# Altium PCB Плата печатная.PcbDoc
Units mm, origin at the board's own origin, x right, y up, seen from the top; angles counter-clockwise.
Board outline 102.74 x 86.87 mm, 2 copper layers (Top Layer, Bottom Layer), stack 1.27 mm thick; 43 components, 38 nets, 143 pads, 13 vias.
Unrouted connection lines stored in the file: 6.
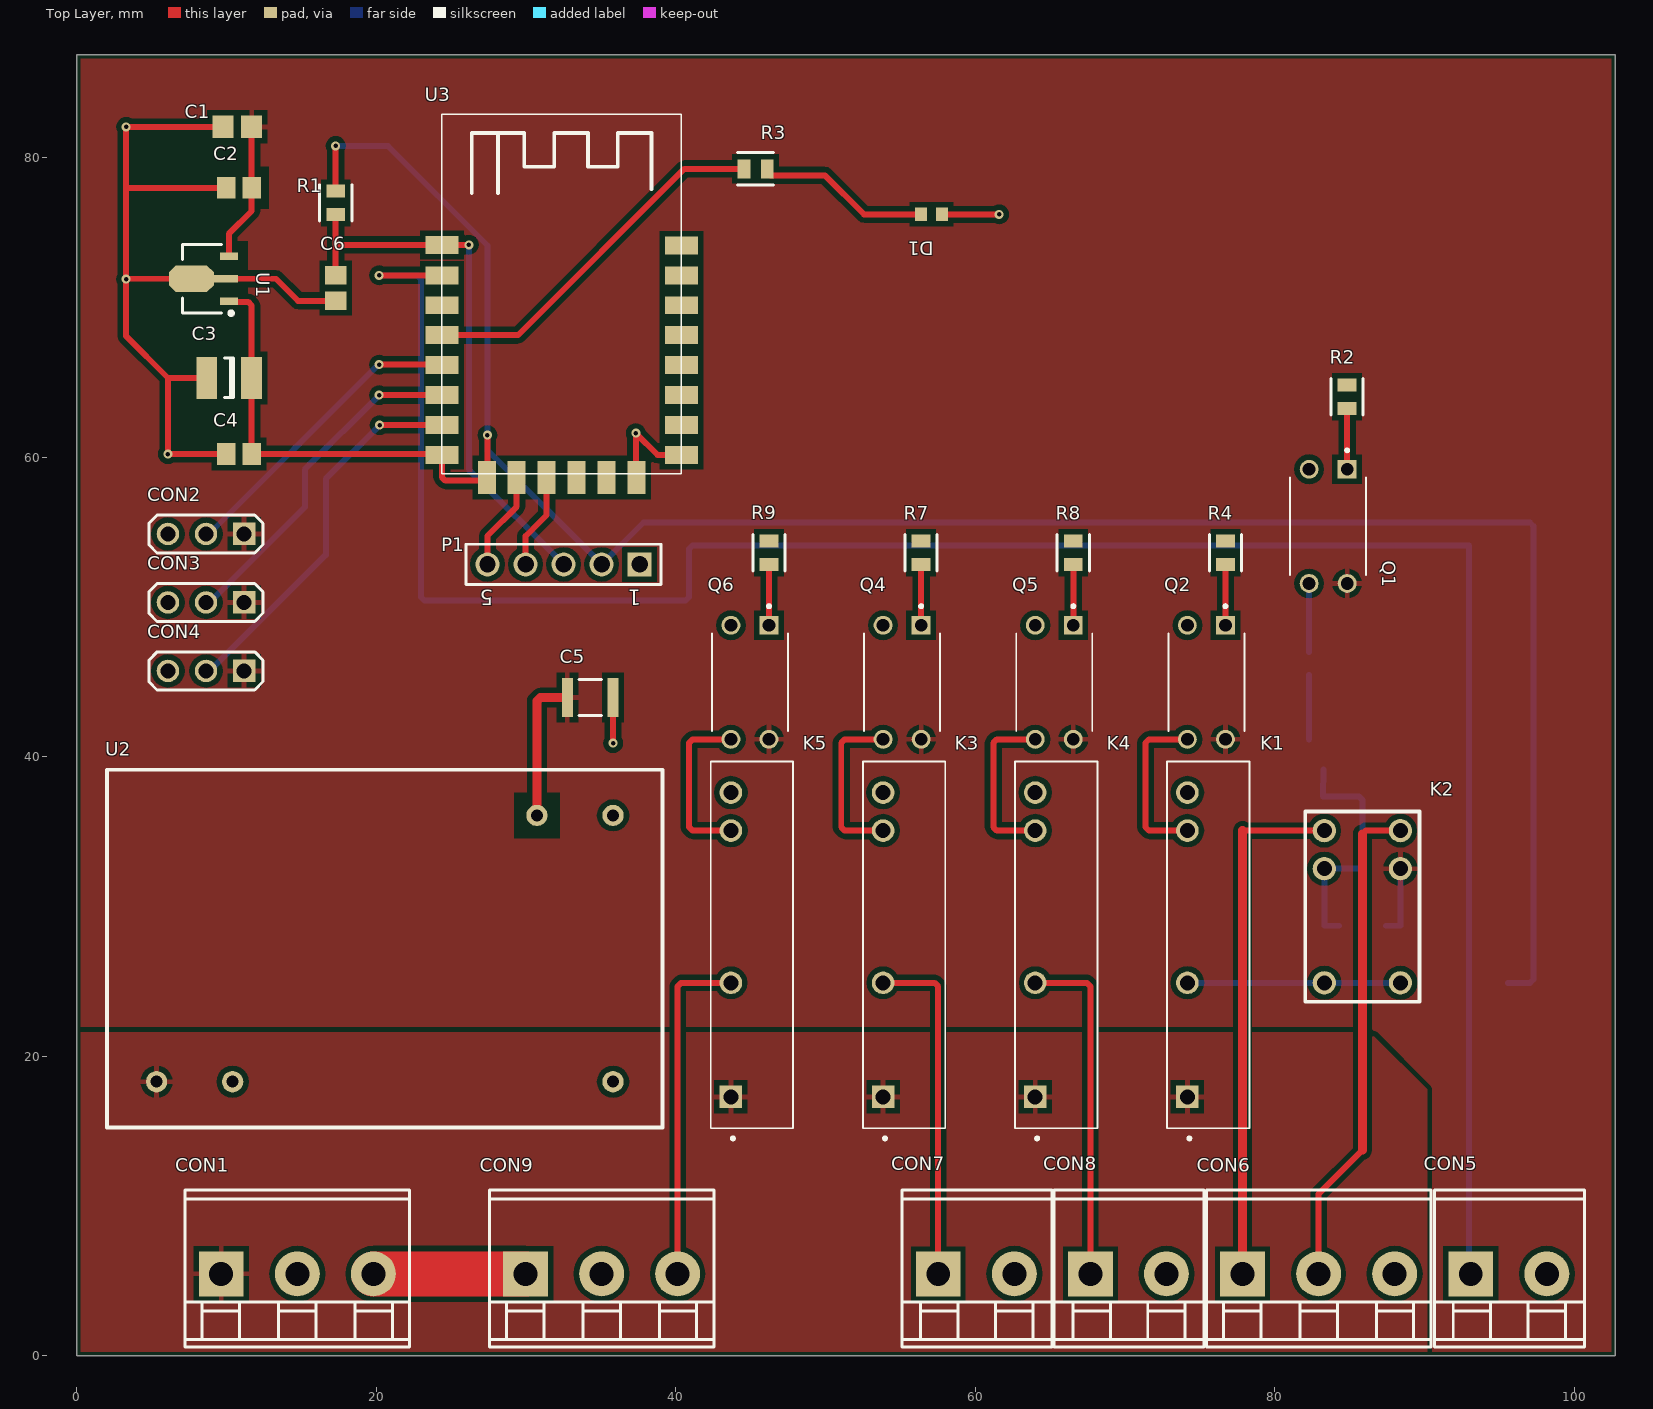
[diagram p0: Top Layer view]
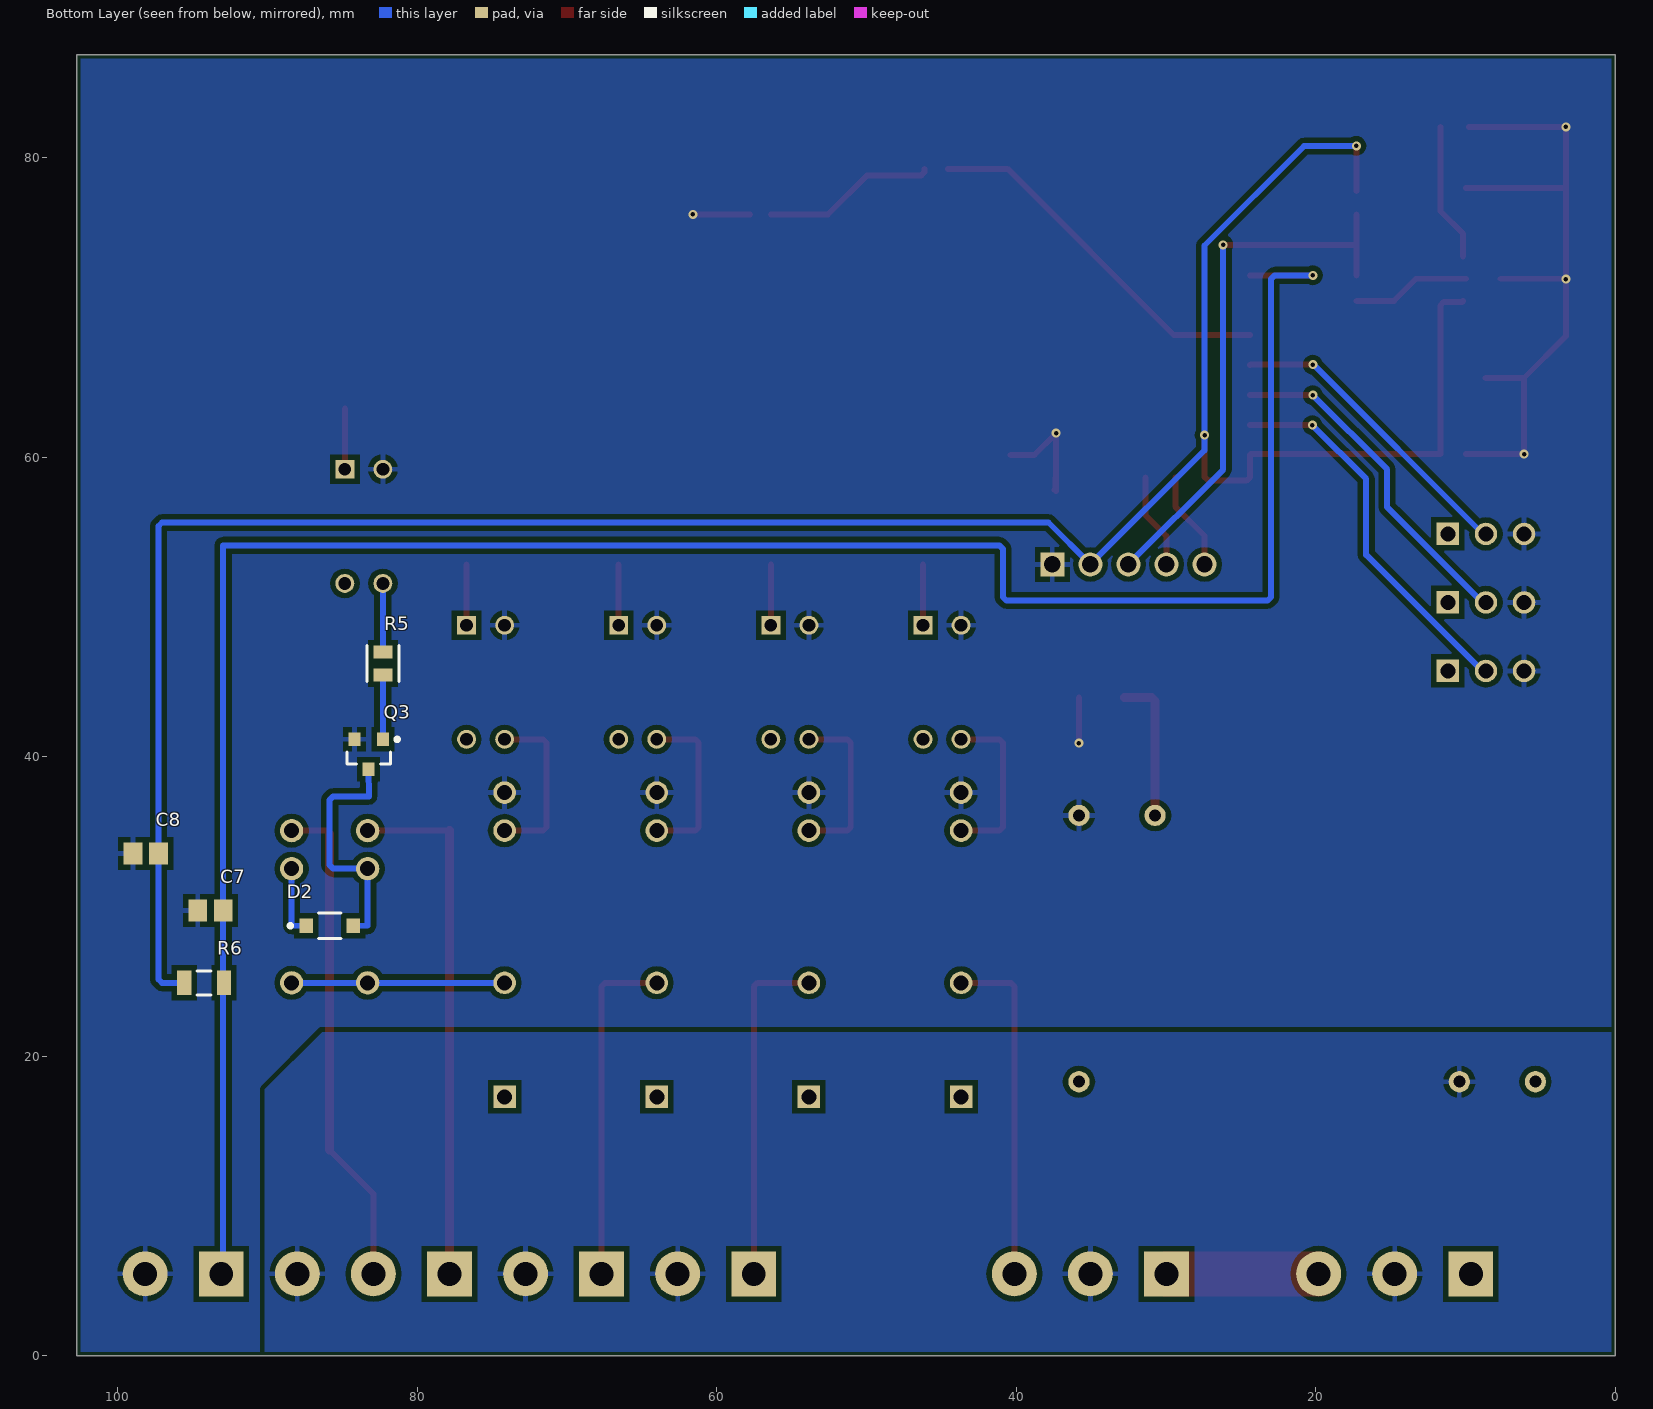
[diagram p1: Bottom Layer view, seen from below]
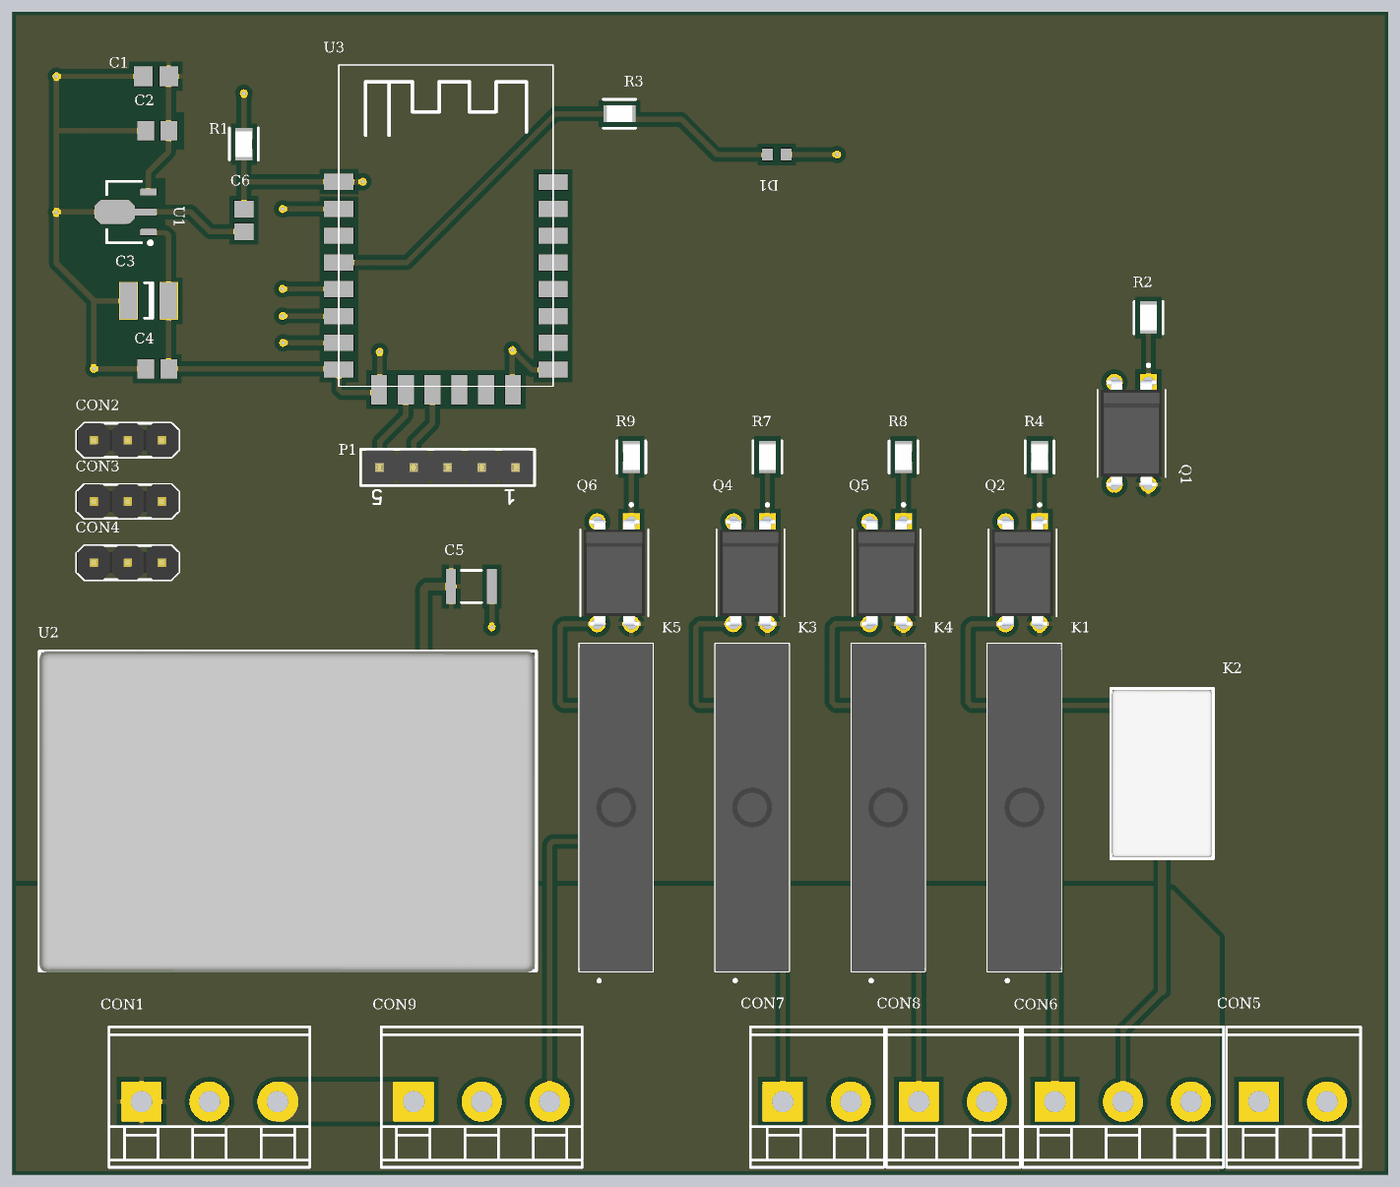
[diagram p2: 3D render of the assembled board from above, using the file's embedded part models]
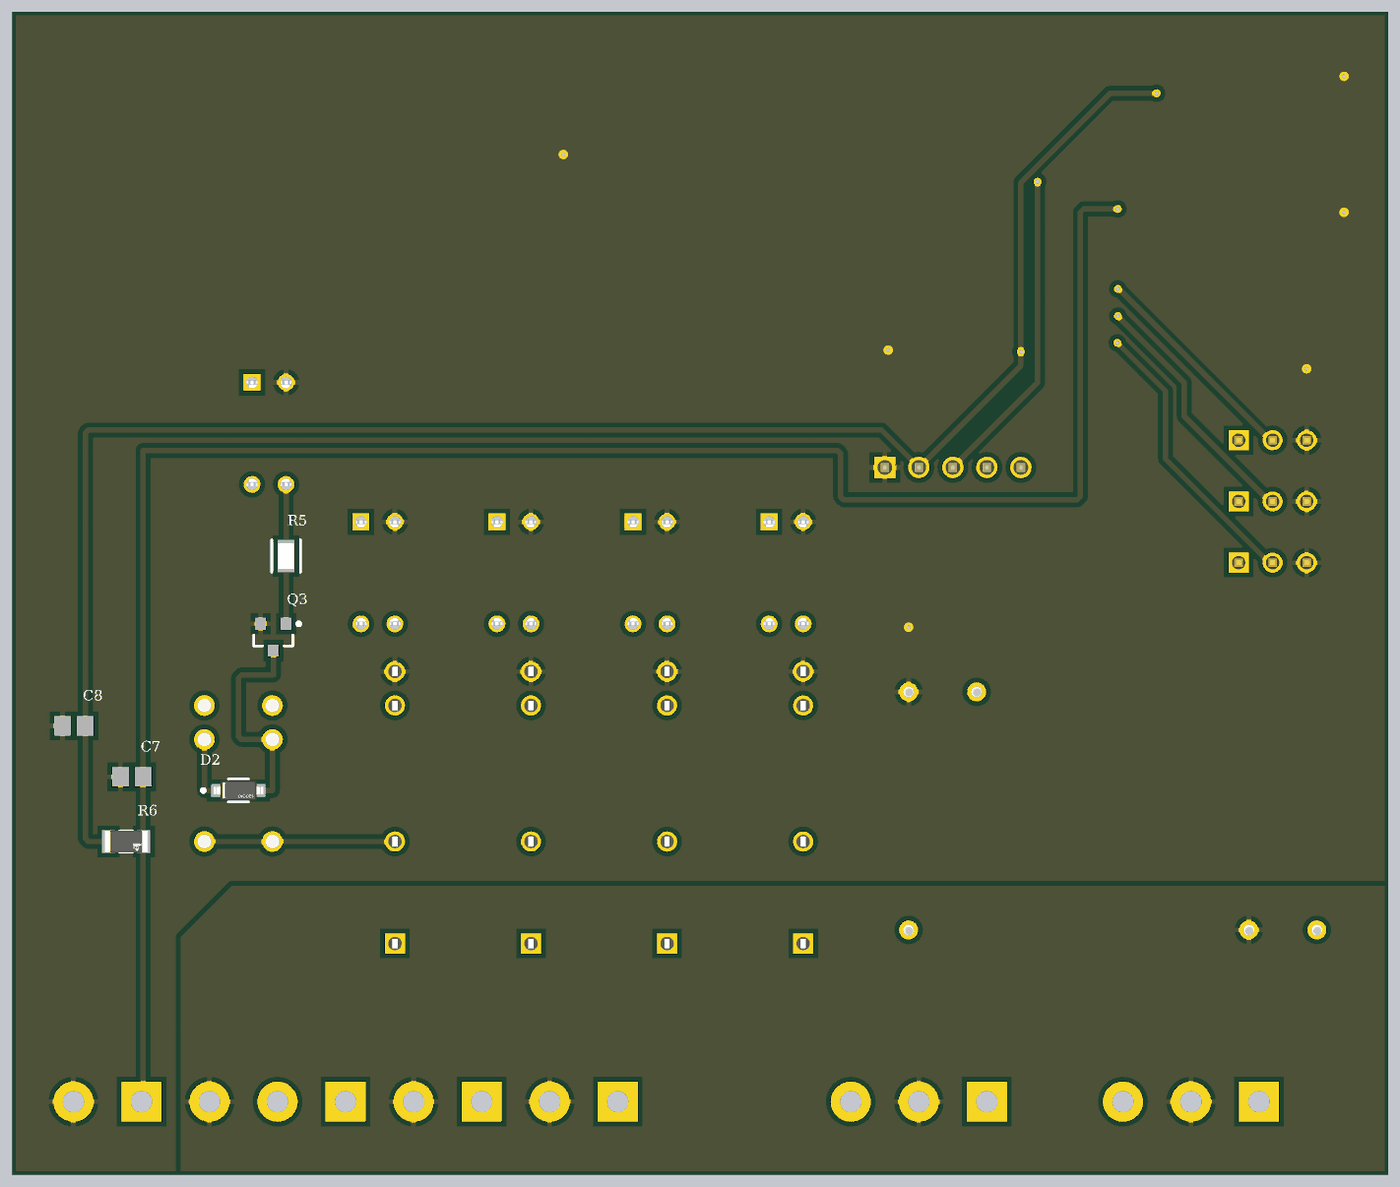
[diagram p3: 3D render of the assembled board from below, using the file's embedded part models]

## Layer stack, top to bottom
Top Solder: solder mask 0.0254, SM-001, Dk 4
Top Layer: signal copper 0.035
Dielectric 1: core 1.2, FR4, Dk 4.6
Bottom Layer: signal copper 0.035
Bottom Solder: solder mask 0.0254, SM-001, Dk 4

## Board outline
0,0 102.743,0 102.743,86.868 0,86.868

## Design rules (kind name [scope] priority, off if disabled: settings)
AcuteAngle [All] p1: minimum=3.50000000000000E+0001 checktracksonly=FALSE
BoardOutlineClearance "BoardOutlineClearance 1" [All] p1: gap=0.25 ignorepadtopadclearanceinfootprint=FALSE except(0: Arc-SplitContinuation Track-SplitContinuation SMDPad-SplitContinuation THPad-SplitContinuation Via-SplitContinuation Fill-SplitContinuation Poly-SplitContinuation Region-SplitContinuation Text-SplitContinuation) // Milling
BoardOutlineClearance "BoardOutlineClearance 2" [All] p2: gap=0.4 ignorepadtopadclearanceinfootprint=FALSE except(0: Arc-SplitContinuation Track-SplitContinuation SMDPad-SplitContinuation THPad-SplitContinuation Via-SplitContinuation Fill-SplitContinuation Poly-SplitContinuation Region-SplitContinuation Text-SplitContinuation) // V-Cut
Clearance "Clearance 3 Oz" [All] p1: gap=0.35 ignorepadtopadclearanceinfootprint=FALSE except(0.25: Arc-Hole Track-Hole SMDPad-Hole THPad-Hole Via-Hole Fill-Hole Poly-Hole Region-Hole Text-Hole)
Clearance "Clearance 2 Oz" [All] p2: gap=0.3 ignorepadtopadclearanceinfootprint=FALSE except(0.25: Arc-Hole Track-Hole SMDPad-Hole THPad-Hole Via-Hole Fill-Hole Poly-Hole Region-Hole Text-Hole)
Clearance "Clearance-1 1 Oz" [All] p3: gap=0.2 ignorepadtopadclearanceinfootprint=FALSE except(0.25: Arc-Hole Track-Hole SMDPad-Hole THPad-Hole Via-Hole Fill-Hole Poly-Hole Region-Hole Text-Hole) // Standart
Clearance "Clearance-2 1 Oz" [All] p4: gap=0.15 ignorepadtopadclearanceinfootprint=FALSE except(0.2: Arc-Fill Arc-Poly Track-Fill Track-Poly SMDPad-Fill SMDPad-Poly THPad-Fill THPad-Poly Via-Fill Via-Poly Fill-Fill Fill-Poly Poly-Poly; 0.25: Arc-Hole Track-Hole SMDPad-Hole THPad-Hole Via-Hole Fill-Hole Poly-Hole Region-Hole Text-Hole) // Advance
Clearance "Clearance-1 1/2 Oz" [All] p5: gap=0.125 ignorepadtopadclearanceinfootprint=FALSE except(0.2: Arc-Fill Arc-Poly Track-Fill Track-Poly SMDPad-SMDPad SMDPad-Fill SMDPad-Poly THPad-Fill THPad-Poly Via-Fill Via-Poly Fill-Fill Fill-Poly Poly-Poly Poly-Region Poly-Text; 0.25: Arc-Hole Track-Hole SMDPad-Hole THPad-Hole Via-Hole Fill-Hole Poly-Hole Region-Hole Text-Hole) // Standart
Clearance "Clearance-2 1/2 Oz" [All] p6: gap=0.1 ignorepadtopadclearanceinfootprint=FALSE except(0.15: Arc-Fill Arc-Poly Track-Fill Track-Poly SMDPad-SMDPad SMDPad-Fill SMDPad-Poly THPad-Fill THPad-Poly Via-Fill Via-Poly Fill-Fill Fill-Poly Poly-Poly Poly-Region Poly-Text; 0.25: Arc-Hole Track-Hole SMDPad-Hole THPad-Hole Via-Hole Fill-Hole Poly-Hole Region-Hole Text-Hole) // Advance
DiffPairsRouting "DiffPairsRouting 1 Oz" [All] p1: maxlimit=0.254 minlimit=0.2 mostfreqgap=0.254 toplayer_minwidth=0.2 toplayer_maxwidth=0.381 toplayer_prefwidth=0.381 bottomlayer_minwidth=0.2 bottomlayer_maxwidth=0.381 bottomlayer_prefwidth=0.381 maxuncoupledlength=12.7
DiffPairsRouting "DiffPairsRouting 1/2 Oz" [All] p2: maxlimit=0.254 minlimit=0.1 mostfreqgap=0.254 toplayer_minwidth=0.1 toplayer_maxwidth=0.381 toplayer_prefwidth=0.381 bottomlayer_minwidth=0.1 bottomlayer_maxwidth=0.381 bottomlayer_prefwidth=0.381 maxuncoupledlength=12.7
HoleSize "Minimum HoleSize" [IsPad] p1: absolutevalues=TRUE maxlimit=5.9 minlimit=0.6 maxpercent=80.000 minpercent=20.000
HoleSize "Minimum HoleSize VIA 1" [IsVia] p2: absolutevalues=TRUE maxlimit=5.9 minlimit=0.3 maxpercent=80.000 minpercent=20.000 // Standart
HoleSize "Minimum HoleSize VIA 2" [IsVia] p3: absolutevalues=TRUE maxlimit=5.9 minlimit=0.2 maxpercent=80.000 minpercent=20.000 // Advance
HoleToHoleClearance Hole2HoleClearance [All] p1: gap=0.25 allowstackedmicrovias=FALSE
MinimumAnnularRing "Minimum AR VIA Standart" [IsVia] p1: minimumring=0.15
MinimumAnnularRing "Minimum AR PAD Standart" [IsPAD] p2: minimumring=0.2
MinimumAnnularRing "Minimum AR VIA Advance" [IsVia] p3: minimumring=0.1
MinimumAnnularRing "Minimum AR PAD Advance" [IsPAD] p4: minimumring=0.15
MinimumSolderMaskSliver "SolderMask Bridge Standart" [All] p1: minsoldermaskwidth=0.15 // All Masks
MinimumSolderMaskSliver "SolderMask Bridge Advance" [All] p2: minsoldermaskwidth=0.1 // Mask LDI
PlaneClearance "PlaneClearance 3 Oz" [All] p1: clearance=0.35
PlaneClearance "PlaneClearance 2 Oz" [All] p2: clearance=0.3
PlaneClearance "PlaneClearance 1 Oz" [All] p3: clearance=0.2
PlaneClearance "PlaneClearance-1 1/2 Oz" [All] p4: clearance=0.2 // Standart
PlaneClearance "PlaneClearance-2 1/2 Oz" [All] p5: clearance=0.15 // Advance
PlaneConnect "TermalConnect 3 Oz" [All] p1: planeconnectstyle=Relief reliefexpansion=0.2 reliefentries=4 reliefconductorwidth=0.35 reliefairgap=0.35 // Standart
PlaneConnect "TermalConnect 2 Oz" [All] p2: planeconnectstyle=Relief reliefexpansion=0.2 reliefentries=4 reliefconductorwidth=0.3 reliefairgap=0.3 // Standart
PlaneConnect "TermalConnect-1 1 Oz" [All] p3: planeconnectstyle=Relief reliefexpansion=0.2 reliefentries=4 reliefconductorwidth=0.2 reliefairgap=0.2 // Standart
PlaneConnect "TermalConnect-2 1 Oz" [All] p4: pad.planeconnectstyle=Relief pad.reliefexpansion=0.15 pad.reliefentries=4 pad.reliefconductorwidth=0.2 pad.reliefairgap=0.2 via.planeconnectstyle=Direct via.reliefexpansion=0.15 via.reliefentries=4 via.reliefconductorwidth=0.15 via.reliefairgap=0.15 // Advance
PlaneConnect "TermalConnect-1 1/2 Oz" [All] p5: planeconnectstyle=Relief reliefexpansion=0.2 reliefentries=4 reliefconductorwidth=0.2 reliefairgap=0.2 // Standart
PlaneConnect "TermalConnect-2 1/2 Oz" [All] p6: pad.planeconnectstyle=Relief pad.reliefexpansion=0.15 pad.reliefentries=4 pad.reliefconductorwidth=0.15 pad.reliefairgap=0.15 via.planeconnectstyle=Direct via.reliefexpansion=0.15 via.reliefentries=4 via.reliefconductorwidth=0.15 via.reliefairgap=0.15 // Advance
PolygonConnect "PolygonConnect 3 Oz" [All] p1: thpad.connectstyle=Relief thpad.reliefconductorwidth=0.35 thpad.reliefentries=4 thpad.polygonreliefangle="90 Angle" thpad.airgapwidth=0.35 smdpad.connectstyle=Relief smdpad.reliefconductorwidth=0.35 smdpad.reliefentries=4 smdpad.polygonreliefangle="90 Angle" smdpad.airgapwidth=0.35 via.connectstyle=Direct via.reliefconductorwidth=0.254 via.reliefentries=4 via.polygonreliefangle="90 Angle" via.airgapwidth=0.254
PolygonConnect "PolygonConnect 2 Oz" [All] p2: thpad.connectstyle=Relief thpad.reliefconductorwidth=0.3 thpad.reliefentries=4 thpad.polygonreliefangle="90 Angle" thpad.airgapwidth=0.3 smdpad.connectstyle=Relief smdpad.reliefconductorwidth=0.3 smdpad.reliefentries=4 smdpad.polygonreliefangle="90 Angle" smdpad.airgapwidth=0.3 via.connectstyle=Direct via.reliefconductorwidth=0.254 via.reliefentries=4 via.polygonreliefangle="90 Angle" via.airgapwidth=0.254
PolygonConnect "PolygonConnect-1 1 Oz" [All] p3: thpad.connectstyle=Relief thpad.reliefconductorwidth=0.2 thpad.reliefentries=4 thpad.polygonreliefangle="90 Angle" thpad.airgapwidth=0.2 smdpad.connectstyle=Relief smdpad.reliefconductorwidth=0.2 smdpad.reliefentries=4 smdpad.polygonreliefangle="90 Angle" smdpad.airgapwidth=0.2 via.connectstyle=Direct via.reliefconductorwidth=0.254 via.reliefentries=4 via.polygonreliefangle="90 Angle" via.airgapwidth=0.254 // Standart
PolygonConnect "PolygonConnect-2 1 Oz" [All] p4: thpad.connectstyle=Relief thpad.reliefconductorwidth=0.15 thpad.reliefentries=4 thpad.polygonreliefangle="90 Angle" thpad.airgapwidth=0.15 smdpad.connectstyle=Relief smdpad.reliefconductorwidth=0.15 smdpad.reliefentries=4 smdpad.polygonreliefangle="90 Angle" smdpad.airgapwidth=0.15 via.connectstyle=Direct via.reliefconductorwidth=0.254 via.reliefentries=4 via.polygonreliefangle="90 Angle" via.airgapwidth=0.254 // Advance
PolygonConnect "PolygonConnect-1 1/2 Oz" [All] p5: thpad.connectstyle=Relief thpad.reliefconductorwidth=0.15 thpad.reliefentries=4 thpad.polygonreliefangle="90 Angle" thpad.airgapwidth=0.2 smdpad.connectstyle=Relief smdpad.reliefconductorwidth=0.2 smdpad.reliefentries=4 smdpad.polygonreliefangle="90 Angle" smdpad.airgapwidth=0.2 via.connectstyle=Direct via.reliefconductorwidth=0.254 via.reliefentries=4 via.polygonreliefangle="90 Angle" via.airgapwidth=0.254 // Standart
PolygonConnect "PolygonConnect-2 1/2 Oz" [All] p6: thpad.connectstyle=Relief thpad.reliefconductorwidth=0.125 thpad.reliefentries=4 thpad.polygonreliefangle="90 Angle" thpad.airgapwidth=0.15 smdpad.connectstyle=Relief smdpad.reliefconductorwidth=0.125 smdpad.reliefentries=4 smdpad.polygonreliefangle="90 Angle" smdpad.airgapwidth=0.15 via.connectstyle=Direct via.reliefconductorwidth=0.254 via.reliefentries=4 via.polygonreliefangle="90 Angle" via.airgapwidth=0.254 // Advance
RoutingCorners [All] p1 off: cornerstyle=45-Degree minsetback=2.54 maxsetback=2.54
RoutingVias [All] p1: holewidth=0.3 width=0.6 viastyle="Through Hole" minholewidth=0.2 minwidth=0.4 maxholewidth=5.9 maxwidth=6.4
SilkToSilkClearance Silk2SilkClearance [All] p1 off: silktosilkclearance=0.15
SilkToSolderMaskClearance Silk2SolderMaskClearance [IsPad] p1 off: minsilkscreentomaskgap=0.15 clearancetoexposedcopper=TRUE
SolderMaskExpansion SolderMaskExpansion-1 [All] p1: expansion=0.05 istentingtop=FALSE // Standart
SolderMaskExpansion "SolderMaskExpansion LDI" [All] p2: expansion=0.025 istentingtop=FALSE // Advance
UnRoutedNet [All] p1: checkbadconnections=TRUE
Width "Width 3 Oz" [All] p1: maxlimit=10 minlimit=0.35 preferedwidth=0.4 checkconnectedcopper=TRUE
Width "Width 2 Oz" [All] p2: maxlimit=10 minlimit=0.3 preferedwidth=0.35 minimp=50.000000 maximp=50.000000 favimp=50.000000 checkconnectedcopper=TRUE
Width "Width 1 Oz" [All] p3: maxlimit=10 minlimit=0.15 preferedwidth=0.2 checkconnectedcopper=TRUE
Width "Width 1/2 Oz" [All] p4: maxlimit=10 minlimit=0.1 preferedwidth=0.125 checkconnectedcopper=TRUE
20 further rules are at their usual default settings.

## Components (designator, comment, footprint, x,y, rotation, side; value= is the part's Value field where it differs from the comment)
C1 "10uF" CAPC2013X135X45ML10T25 10.734,82.042 r0 top
C2 "0.1uF" CAPC2013X140X45NL15T25 10.834,77.978 r0 top
C3 "1uF" TANTAL_B 10.184,65.278 r0 top
C4 "0.1uF" CAPC2013X140X45NL15T25 10.834,60.198 r0 top
C5 "47uF" MURA-1210_H_2.7_L 34.291,43.942 r180 top
C6 "0.1uF" CAPC2013X140X45NL15T25 17.297,71.286 r90 top
C7 "0.1uF" CAPC2013X140X45NL15T25 93.814,29.718 r180 bottom
C8 "0.1uF" CAPC2013X140X45NL15T25 98.132,33.528 r180 bottom
CON1 "DG129-5.08-3" DG129-5.08-3 14.732,5.461 r0 top locked
CON2 "PLS-03" PLS-03 8.636,54.864 r180 top
CON3 "PLS-03" PLS-03 8.636,50.292 r180 top
CON4 "PLS-03" PLS-03 8.636,45.72 r180 top
CON5 "DG129-5.08-2" DG129-5.08-2 98.171,5.461 r0 top locked
CON6 "DG129-5.08-3" DG129-5.08-3 82.931,5.461 r0 top locked
CON7 "DG129-5.08-2" DG129-5.08-2 62.611,5.461 r0 top locked
CON8 "DG129-5.08-2" DG129-5.08-2 72.771,5.461 r0 top locked
CON9 "DG129-5.08-3" DG129-5.08-3 35.052,5.461 r0 top locked
D1 "STATUS LED" 1608[0603] 57.088,76.2 r0 top
D2 "1N4148W-13-F" FP-SOD123-MFG 85.852,28.702 r180 bottom value=2pF
K1 "G3MB-202PDC5" RELAY_G3MB-202PDC5 75.568,27.432 r90 top
K2 "NRP-03K-C-05D-H" NRP-03K-C-05D-H 83.312,35.052 r270 top
K3 "G3MB-202PDC5" RELAY_G3MB-202PDC5 55.248,27.432 r90 top
K4 "G3MB-202PDC5" RELAY_G3MB-202PDC5 65.408,27.432 r90 top
K5 "G3MB-202PDC5" RELAY_G3MB-202PDC5 45.088,27.432 r90 top
P1 "61300511121" 61300511121 32.512,52.832 r180 top
Q1 "PC817C" DIP762W50P254L650H458Q4B 83.566,55.372 r270 top
Q2 "PC817C" DIP762W50P254L650H458Q4B 75.438,44.958 r270 top
Q3 "MMBT2222ALT3G" ONSC-SOT-23-3-318-08_V 83.246,40.148 r270 bottom
Q4 "PC817C" DIP762W50P254L650H458Q4B 55.118,44.958 r270 top
Q5 "PC817C" DIP762W50P254L650H458Q4B 65.278,44.958 r270 top
Q6 "PC817C" DIP762W50P254L650H458Q4B 44.958,44.958 r270 top
R1 "1k" FP-CR0805-IPC_C 17.297,76.977 r90 top
R2 "150" FP-CR0805-IPC_C 84.836,64.023 r270 top
R3 "100" FP-CR0805-IPC_C 45.339,79.248 r0 top
R4 "150" FP-CR0805-IPC_C 76.708,53.609 r270 top
R5 "300" FP-CR0805-IPC_C 82.296,46.213 r270 bottom
R6 "47k" FP-CRCW1206-e3-IPC_C 94.234,24.892 r180 bottom
R7 "150" FP-CR0805-IPC_C 56.388,53.609 r270 top
R8 "150" FP-CR0805-IPC_C 66.548,53.609 r270 top
R9 "150" FP-CR0805-IPC_C 46.228,53.609 r270 top
U1 "L78L33ABUTR" SOT-89_L 8.46,71.906 r180 top
U2 "IRM-03-5" footprint_IRM-03-5 5.334,18.288 r0 top
U3 "ZS3L" zs3l 32.384,66.386 r0 top

## Footprints (in the part's own frame and the unit in brackets; to place one, negate y for a bottom-side part, rotate by r counter-clockwise, add the part's x,y. Pads: shape width x height; smd on the part's side, far side on the other; paste and mask are expansions set on the pad)
1608[0603] [mm] "Chip Capacitor, Body 1.6x0.8mm, IPC High Density"
  rect 0.8x0.9 smd: 1(-0.7,0) 2(0.7,0)
  body extent -0.87,-0.48 0.87,0.48, height 1.3
61300511121 [mm] "Pin Header, pitch 2.54 mm, THT, Vertical, single row, 5p"
  rect 1.6x1.6 hole 1.1: 1(-5.08,0)
  round 1.6 hole 1.1: 2(-2.54,0) 3(0,0) 4(2.54,0) 5(5.08,0)
  silkscreen extent -6.5,-1.35 6.5,1.35, body extent -6.35,-1.27 6.35,1.27, height 8.57
CAPC2013X135X45ML10T25 [mm] "Chip Capacitor, 2-Leads, Body 2.10x1.35mm, IPC Low Density"
  rect 1.4x1.5 smd: 1(-0.95,0) 2(0.95,0)
  body extent -1.05,-0.67 1.05,0.67, height 1.35
CAPC2013X140X45NL15T25 [mm] "Chip Capacitor, 2-Leads, Body 2.00x1.25mm, IPC Medium Density"
  rect 1.25x1.45 smd: 1(-0.85,0) 2(0.85,0)
  body extent -1.08,-0.7 1.07,0.7, height 1.4
DG129-5.08-2 [mm]
  rect 3x3 hole 1.6 paste-0.05 mask+0.05: 1(-5.08,0)
  round 3 hole 1.6 paste-0.05 mask+0.05: 2(0,0)
  silkscreen extent -7.5,-4.9 2.5,5.6, body extent -8.23,-5.25 2.53,6.1, height 18
DG129-5.08-3 [mm]
  rect 3x3 hole 1.6 paste-0.05 mask+0.05: 1(-5.08,0)
  round 3 hole 1.6 paste-0.05 mask+0.05: 2(0,0) 3(5.08,0)
  silkscreen extent -7.5,-4.9 7.5,5.6, body extent -8.15,-5.33 7.69,6.03, height 18
DIP762W50P254L650H458Q4B [mm]
  rect 1.26x1.26 hole 0.85: 1(-3.81,1.27)
  round 1.26 hole 0.85: 2(-3.81,-1.27) 3(3.81,-1.27) 4(3.81,1.27)
  silkscreen extent -5.18,-2.54 3.25,2.54, body extent -3.94,-2.29 3.94,2.29, height 4.8
footprint_IRM-03-5 [mil]
  round 56 hole 31.5: +V(1000,700) -V(1200,700) AC/L(0,0) AC/N(200,0) NC(1200,0)
  silkscreen extent -130,-120 1330,820, body extent -130,-125 1327,820, height 591
FP-CR0805-IPC_C [mm]
  rect 0.858x1.262 smd paste+0 mask+0: 1(-0.777,0) 2(0.777,0)
  silkscreen extent -1.21,-1.07 1.21,1.07, body extent -1.31,-0.77 1.31,0.77, height 0.25
FP-CRCW1206-e3-IPC_C [mm]
  rect 0.956x1.658 smd paste+0 mask+0: 1(-1.326,0) 2(1.326,0)
  silkscreen extent -0.47,-0.8 0.47,0.8, body extent -1.6,-0.8 1.6,0.8, height 0.6
FP-SOD123-MFG [mm]
  rect 0.9x0.95 smd paste+0 mask+0: 1(-1.575,0) 2(1.575,0)
  silkscreen extent -2.75,-0.85 0.75,0.85, body extent -1.85,-0.77 1.85,0.77, height 1.45
MURA-1210_H_2.7_L [mm] "Chip Capacitor, 2-Leads, Body 3.5x2.7mm, IPC High Density"
  rect 0.75x2.6 smd: 1(-1.525,0) 2(1.525,0)
  silkscreen extent -0.75,-1.2 0.75,1.2, body extent -1.75,-1.35 1.75,1.35, height 2.7
NRP-03K-C-05D-H [mm]
  round 1.55 hole 1: 1(2.54,5.08) 2(2.54,0) 3(0,0) 4(10.16,5.08) 5(10.16,0) 6(0,5.08)
  silkscreen extent -1.27,-1.27 11.43,6.35, body extent -1.17,-1.22 11.33,6.28, height 10
ONSC-SOT-23-3-318-08_V [mm] "SOT23, 3-Leads, Body 2.92x1.3mm, Pitch 0.95mm"
  rect 0.9x0.8 smd: 1(-1,0.95) 2(-1,-0.95) 3(1,0)
  silkscreen extent -1.12,-1.46 0.65,2.02, body extent -0.65,-1.46 0.65,1.46, height 1.11
PLS-03 [mm]
  rect 1.5x1.5 hole 1 paste-0.05 mask+0.05: 1(-2.54,0)
  round 1.5 hole 1 paste-0.05 mask+0.05: 2(0,0) 3(2.54,0)
  silkscreen extent -3.81,-1.27 3.81,1.27, body extent -3.81,-1.27 3.81,1.27, height 8.6
RELAY_G3MB-202PDC5 [mm]
  rect 1.508x1.508 hole 1: 1(-10.16,1.4)
  round 1.508 hole 1: 2(-2.54,1.4) 3(7.62,1.4) 4(10.16,1.4)
  silkscreen extent -13.03,-2.75 12.25,2.75, body extent -12.25,-2.75 12.25,2.75, height 20.5
SOT-89_L [mm] "SOT89, 3-Leads, Body 4.5x2.4 mm, Pitch 1.5mm, Lead Span 4.1mm, IPC High Density"
  rect 1.2x0.5 smd: 1(-1.7,1.5) 3(-1.7,-1.5)
  rect 1.6x0.5 smd: 2(-1.5,0)
  oct 3x1.8 smd: 2(0.8,0)
  silkscreen extent -1.98,-2.3 1.4,2.42, body extent -1.2,-2.3 1.4,2.3, height 1.6
TANTAL_B [mm]
  rect 1.4x2.8 smd paste-0.05 mask+0.05: 1(1.5,0) 2(-1.5,0)
  silkscreen extent -0.3,-1.35 0.3,1.35, body extent -1.75,-1.4 1.75,1.4, height 1.9
zs3l [mm]
  rect 2.2x1.2 smd: 1(-8,7.782) 2(-8,5.75) 3(-8,3.75) 4(-8,1.75) 5(-8,-0.25) 6(-8,-2.25) 7(-8,-4.25) 8(-8,-6.25) 15(8,-6.25) 16(8,-4.25) 17(8,-2.25) 18(8,-0.25) 19(8,1.75) 20(8,3.75) 21(8,5.75) 22(8,7.75)
  rect 1.2x2.2 smd: 9(-5,-7.75) 10(-3,-7.75) 11(-1,-7.75) 12(1,-7.75) 13(3,-7.75) 14(5,-7.75)
  silkscreen extent -8,-7.5 8,16.5

## Part data
C1: library part CMP-2000-04946-1, "GRM21BR61E106KA73L / 10uF, +/- 10%, 25 V, 0805", Capacitance=1µF, Case Size/Dimension=0805, Dielectric=X7R, Manufacturer=Murata, Package Description="2-Pin Surface Mount Device, Body 2 x 1.25 mm", Package Reference=805, Rated Voltage=16V, Tolerance (%)=±10%, Datasheet URL=https://datasheet.ciiva.com/34302/1858922-34302874.pdf, Datasheet Version=Mar-08, Manufacturer URL=http://www.murata.com/
C2 C4 C6 C7 C8: library part CMP-2007-03401-1, "GRM21BR71H104K / 0.1 мкФ X7R 10% 50В 0805", Manufacturer=Murata, Part Number=GRM21BR71C475KA73L
C3: library part _TANTAL-B, "TANTAL TECAP1/50V B, 10%", Lifetime @ Temp=2000Hrs@105℃, Assembly type="Manual Part", Note="Tantalum Capacitors", Publisher="Catcatcat Electronics", website developer=http://catcatcat.d-lan.dp.ua/
C5: library part CMP-2000-06362-1, "Cap Ceramic, 47 uF, +/- 10%, -55 to 85 degC, 2-Pin SMD (1210), RoHS, Tape and Reel", Capacitance=47µF, Manufacturer=Murata, Operating Temperature=-55°C~85°C, Package / Case=1210(3225Metric), Package Description="2-Pin Surface Mount Device, Body 3.2 x 2.5 mm", Package Reference=1210, Ratings=-, Standard Package=1, Temperature Coefficient=X5R, Tolerance=±10%, Voltage - Rated=16V, Applications=GeneralPurpose, Catalog Drawings=GRMSeries_1210_2.5, Category=Capacitors, Datasheet URL=http://psearch.en.murata.com/capacitor/product/GRM32ER61C476KE15%23.pdf, Datasheet Version=04/2016, Family=CeramicCapacitors, Features=-, Height - Seated (Max)=-, Lead Spacing=-, Lead Style=-, Manufacturer URL=http://www.murata.com/, Mounting Technology=SurfaceMount, Mounting Type=SurfaceMount,MLCC, Online Catalog=GRMSeries, Other Names=490-6539-6, Packaging=Digi-Reel®, Product Training Modules=High-CapMultilayerCeramicCapacitors, Series=GRM, Size / Dimension="0.126\"Lx0.098\"W(3.20mmx2.50mm)", Thickness (Max)="0.106\"(2.70mm)", Voltage Rating DC=16V
CON1 CON5 CON6 CON7 CON8 CON9: Temp.Characteristic="-40C to +85C", Assembly type="Manual Part", Note=Connector, Publisher="Catcatcat Electronics", website developer=http://catcatcat.d-lan.dp.ua/
CON2 CON3 CON4: "2.54 mm", Temp.Characteristic="-40C to +85C", Assembly type="Manual Part", Note=Connector, Publisher="Catcatcat Electronics", website developer=http://catcatcat.d-lan.dp.ua/
D1: library part LED2, "Typical RED, GREEN, YELLOW, AMBER GaAs LED", LatestRevisionDate=17-Jul-2002, LatestRevisionNote="Re-released for DXP Platform.", PackageDescription="SM LED; 2 Flat Leads", PackageReference=3.2X1.6X1.1, PackageVersion=Feb-2002, Published=8-Jun-2000, Publisher="Altium Limited"
D2: library part CMP-12791-000005-1, "DIODE GEN PURP 100V 150MA SOD123", Capacitance=2pF, Forward Current=300mA, Manufacturer="Diodes Inc.", Max Junction Temp=+150°C, Max Repetitive Reverse Voltage=100V, Max Surge Forward Current=1A, Package=SOD123, Peak Reverse Current=1uA, Temperature="-65°C to +150°C", Temperature Range Low=-65°C, Automotive=No, Category=Diode, ComponentLink2Description=Datasheet, ComponentLink2URL=https://upverter.com/datasheet/628e7d6fee5901eee6eef4567d1c3569f2cd3cde.pdf, Device Class L1="Discrete Semiconductors", Device Class L2=Diodes, Device Class L3="Rectifier Diodes", Digikey Description="DIODE GEN PURP 100V 150MA SOD123", Footprint Url=https://www.diodes.com/assets/Package-Files/SOD123.pdf, Height=1.45mm, Lead Free=Yes, Manufacturer Part Number=1N4148W-13-F, Mouser Description="1N4148W Series 2 A 100 V 400 mW Surface Mount Fast Switching Diode - SOD-123", Octopart=https://octopart.com/1n4148w-13-f-diodes+inc.-2359612, Reverse Voltage=100V, RoHS=TRUE, Standoff Height=0mm, Temperature Range High=+150°C
K1 K3 K4 K5: Package=None, Availability=Unavailable, MF="{'manufacturer': u'Omron Automation'}", MP=G3MB-202PDC5, Price=None
P1: library part CMP-1502-01068-1, "THT Vertical Pin Header WR-PHD, Pitch 2.54 mm, Single Row, 5 pins", Contact Resistance=20mOhm, Manufacturer="Wurth Elektronik", Operating Temperature=-40to105degC, Rated Current=3A, Withstanding Voltage=500VAC, Working Voltage=250VAC, Datasheet URL=https://katalog.we-online.de/em/datasheet/6130xx11121.pdf, Gender=Male, Manufacturer URL=http://www.we-online.de, Mounting Technology=THT, Orientation=Vertical, Package Reference=61300511121, Packaging=Bag, Part Number=61300511121, Pin Number=5, Pitch=2.54mm, Publisher=WurthElektronik, Row Number=Single
Q1 Q2 Q4 Q5 Q6: "High Density Mounting Type Photocoupler", Package=None, Availability=Unavailable, MF="{'manufacturer': u'Taiwan Semiconductor'}", MP=PC817C, Price=None
Q3: library part CMP-1048-00592-1, "General Purpose Transistor, NPN Silicon, 3-Pin SOT-23, Pb-Free, Tape and Reel", Manufacturer="On Semiconductor", ComponentLink1Description="Manufacturer URL", ComponentLink1URL=http://www.onsemi.com/, ComponentLink2Description=Datasheet, ComponentLink2URL=http://www.onsemi.cn/pub_link/Collateral/MMBT2222LT1-D.PDF, ComponentLink3Description="Package Specification", ComponentLink3URL=http://www.onsemi.cn/pub_link/Collateral/318-08.PDF, DatasheetVersion="Rev. 10", fT Min (MHz)=300, IC Continuous (A)=0.6, Mounting Technology="Surface Mount", PackageDescription="3-Pin Small Outline Transistor, Body 2.92 x 1.3 mm, Pitch 0.95 mm", PackageReference=SOT-23-3-318-08, PackageVersion="Rev. AP, 11/2009", Packing="Tape and Reel", PartNumber=MMBT2222ALT3G, Polarity=NPN, RoHS=TRUE
R1 R2 R3 R4 R7 R8 R9: library part CMP-07231-005922-1, "0805 150Ω 0.125W 1%", Case Code (Imperial)=0805, Case Code (Metric)=2012, Max Operating Temperature=155°C, Max Power Dissipation=125mW, Min Operating Temperature=-55°C, Package Quantity=1, Resistance=300kR, Temperature Coefficient=100ppm/°C, Tolerance=1%, Voltage Rating=150V, Case/Package=0805, Composition="Thick Film", Contact Plating=Tin, Depth=1.25mm, Features="Moisture Resistant", Height=0.024inch, Length=2mm, Military Standard=Not, Mount="Surface Mount", Number of Terminations=2, Packaging="Tape and Reel", Power Rating=125mW, Radiation Hardening=No, Termination=SMD/SMT, Thickness=508um, Width=0.049inch
R5: library part CMP-07231-005922-1, "0805 300kΩ 0.125W 1%", Case Code (Imperial)=0805, Case Code (Metric)=2012, Max Operating Temperature=155°C, Max Power Dissipation=125mW, Min Operating Temperature=-55°C, Package Quantity=1, Resistance=300kR, Temperature Coefficient=100ppm/°C, Tolerance=1%, Voltage Rating=150V, Case/Package=0805, Composition="Thick Film", Contact Plating=Tin, Depth=1.25mm, Features="Moisture Resistant", Height=0.024inch, Length=2mm, Military Standard=Not, Mount="Surface Mount", Number of Terminations=2, Packaging="Tape and Reel", Power Rating=125mW, Radiation Hardening=No, Termination=SMD/SMT, Thickness=508um, Width=0.049inch
R6: library part CMP-2003-04807-2, "10kΩ, 1%, 0.25W 1206", Case Code (Imperial)=1206, Case Code (Metric)=3216, Max Operating Temperature=155°C, Max Power Dissipation=250mW, Min Operating Temperature=-55°C, Package Quantity=10, Resistance=10kR, Temperature Coefficient=100ppm/°C, Tolerance=1%, Voltage Rating=200V, Case/Package=1206, Composition="Thick Film", Contact Plating=Tin, Depth=1.6mm, Features="Automotive AEC-Q200", Height=0.55mm, Lead Free="Lead Free", Length=3.2mm, Military Standard=Not, Number of Pins=2, Number of Terminations=2, Packaging="Tape and Reel", Power Rating=250mW, Radiation Hardening=No, Termination=SMD/SMT, Voltage Rating (DC)=200V, Weight=0.000353oz, Width=0.063inch, Working Voltage=200V
U1: library part CMP-0244-00410-1, "Positive Voltage Regulator, 3.3V, 4-Pin SOT-89, Tape and Reel https://www.chipdip.ru/product/l78l33abutr", ComponentLink1Description="Manufacturer URL", ComponentLink1URL=https://www.chipdip.ru/product/l78l33abutr, ComponentLink2Description=Datasheet, ComponentLink2URL=http://www.st.com/internet/com/TECHNICAL_RESOURCES/TECHNICAL_LITERATURE/DATASHEET/CD00000446.pdf, DatasheetVersion=1/02/2011, PackageDescription="3-Pin SOT-89 Package 1.5 mm Pitch, 4.1 mm Lead Span", PackageReference=SOT-89, PackageVersion=2011
U2: "AC-DC Single output Encapsulated power supply; Output 5Vdc at 0.6A; PCB mount, miniature size", Package=None, Availability=Unavailable, MF="{'manufacturer': u'MEAN WELL'}", MP=IRM-03-5, Price=None
U3: library part ZS3l, "ZS3L module on chip EFR32MG21A020F768IM32"

## Via types
v1: diameter 0.6, hole 0.3, Top Layer to Bottom Layer, 13 vias

## Nets (pads, with @x,y where several pads share a name; then routed paths per layer and width w, separated by ;. In a path a pad name is that pad's centre, name@x,y a point inside that pad or via, vN(x,y) a via of type N, cw(c..) or ccw(c..) an arc to the next point about the centre after c; other vN are vias at no path point)
220V(L): CON1.1 K1.1 K3.1 K4.1 K5.1 U2.AC/L
220V(N): CON1.2 CON6.3 CON7.2 CON8.2 CON9.2 U2.AC/N
+3.3V: C3.1 C4.2 C8.2 P1.2 R1.2 R6.1 U1.1 U3.8 U3.9 | length 167.7
  Top Layer w0.4: U1.1 10.208,70.358 11.45,70.358 11.684,70.124 C3.1 C4.2 24.322,60.198 U3.8 24.384,58.654 24.618,58.42 27.168,58.42 U3.9 27.432,58.684 v1(27.432,61.468) ; R1.2 v1(17.297,80.772)
  Bottom Layer w0.4: v1(17.297,80.772) 20.784,80.772 27.432,74.124 27.432,60.452 P1.2 37.846,55.626 97.048,55.626 97.282,55.392 C8.2 97.282,25.126 97.048,24.892 R6.1
+5V: C1.2 C2.2 C5.2 CON2.1 CON3.1 CON4.1 D2.1 K2.1 Q1.4 Q2.4 Q4.4 Q5.4 Q6.4 U1.3 U2.+V | length 23.8
  Top Layer w0.4: U1.3 10.16,74.905 11.684,76.429 C1.2
  Top Layer w0.6: U2.+V 30.734,43.708 30.968,43.942 C5.2
  Bottom Layer w0.4: D2.1 88.392,28.702 K2.1
ACT_EN_1: R7.1 U3.20
ACT_EN_2: R8.1 U3.19
GND_AC: CON1.3 CON9.1 | length 10.2
  Top Layer w3: CON1.3 CON9.1
GND_DC: C1.1 C2.1 C3.2 C4.1 C5.1 C6.1 C7.1 C8.1 CON2.3 CON3.3 CON4.3 CON5.2 D1.2 K1.4 K3.4 K4.4 K5.4 P1.1 Q1.2 Q2.2 Q3.2 Q4.2 Q5.2 Q6.2 U1.2 U2.-V U3.12 U3.14 U3.15 | length 70.4
  Top Layer w0.4: U1.2@7.66,71.906 3.326,71.906 v1(3.302,71.882) ; C3.2 6.096,65.278 ; C1.1 v1(3.302,82.042) 3.302,77.978 ; U1.2@9.96,71.906 13.311,71.906 14.781,70.436 C6.1 ; C4.1 v1(6.096,60.198) 6.096,65.278 ; C2.1 3.302,77.978 ; U2.-V U2.-V ; v1(35.814,40.894) v1(35.814,40.894) 35.815,43.941 C5.1 ; U3.14 37.384,57.866 37.465,57.785 37.387,57.785 37.338,57.736 37.338,58.636 v1(37.338,61.595) 38.797,60.136 U3.15 ; D1.2 v1(61.595,76.2) ; v1(3.302,71.882) 3.302,68.072 6.096,65.278 ; v1(3.302,71.882) 3.302,77.978
LED: R3.1 U3.4 | length 24.8
  Top Layer w0.4: U3.4 29.468,68.136 40.58,79.248 R3.1
MIXER_DIR: R2.1 U3.16
MIXER_DO: R4.1 U3.17
NetCON6_1: CON6.1 K2.3 | length 35.1
  Top Layer w0.4: 77.851,35.052 K2.3
  Top Layer w0.6: CON6.1 77.851,35.052
NetCON6_2: CON6.2 K2.6 | length 33.2
  Top Layer w0.4: CON6.2 82.931,10.795 85.852,13.716 ; 85.852,34.818 86.086,35.052 K2.6
  Top Layer w0.6: 85.852,13.716 85.852,34.818
NetCON7_1: CON7.1 K3.2 | length 23
  Top Layer w0.4: K3.2 57.297,24.892 57.531,24.658 CON7.1
NetCON8_1: CON8.1 K4.2 | length 23
  Top Layer w0.4: K4.2 67.457,24.892 67.691,24.658 CON8.1
NetCON9_3: CON9.3 K5.2 | length 22.8
  Top Layer w0.4: CON9.3 40.132,24.658 40.366,24.892 K5.2
NetD1_1: D1.1 R3.2 | length 11.7
  Top Layer w0.4: R3.2 46.116,79.046 46.345,78.817 49.961,78.817 52.578,76.2 D1.1
NetD2_2: D2.2 K2.2 Q3.3 | length 16.3
  Bottom Layer w0.4: Q3.3 83.236,37.338 85.618,37.338 85.852,37.104 85.852,32.746 85.618,32.512 K2.2 83.312,28.702 D2.2
NetK1_2: K1.2 K2.4 K2.5 | length 14.2
  Bottom Layer w0.4: K1.2 K2.5 K2.4
NetK1_3: K1.3 Q2.3 | length 11.4
  Top Layer w0.4: K1.3 71.608,35.052 71.374,35.286 71.374,40.914 71.608,41.148 Q2.3
NetK3_3: K3.3 Q4.3 | length 11.4
  Top Layer w0.4: K3.3 51.288,35.052 51.054,35.286 51.054,40.914 51.288,41.148 Q4.3
NetK4_3: K4.3 Q5.3 | length 11.4
  Top Layer w0.4: K4.3 61.448,35.052 61.214,35.286 61.214,40.914 61.448,41.148 Q5.3
NetK5_3: K5.3 Q6.3 | length 11.4
  Top Layer w0.4: K5.3 41.128,35.052 40.894,35.286 40.894,40.914 41.128,41.148 Q6.3
NetP1_4: P1.4 U3.11 | length 6.4
  Top Layer w0.4: P1.4 29.972,54.722 31.384,56.134 U3.11
NetP1_5: P1.5 U3.10 | length 6.6
  Top Layer w0.4: P1.5 27.432,54.737 29.384,56.689 U3.10
NetQ1_1: Q1.1 R2.2 | length 4.1
  Top Layer w0.4: Q1.1 R2.2
NetQ1_3: Q1.3 R5.1 | length 4.6
  Bottom Layer w0.4: R5.1 Q1.3
NetQ2_1: Q2.1 R4.2 | length 4.1
  Top Layer w0.4: Q2.1 R4.2
NetQ3_1: Q3.1 R5.2 | length 4.3
  Bottom Layer w0.4: Q3.1 R5.2
NetQ4_1: Q4.1 R7.2 | length 4.1
  Top Layer w0.4: Q4.1 R7.2
NetQ5_1: Q5.1 R8.2 | length 4.1
  Top Layer w0.4: Q5.1 R8.2
NetQ6_1: Q6.1 R9.2 | length 4.1
  Top Layer w0.4: Q6.1 R9.2
PUMP: R9.1 U3.18
RST: C6.2 P1.3 R1.1 U3.1 | length 36.9
  Top Layer w0.4: C6.2 17.297,74.168 ; R1.1 17.297,74.168 ; v1(26.185,74.168) U3.1 17.297,74.168
  Bottom Layer w0.4: v1(26.185,74.168) 26.185,59.159 P1.3
T_MEAS: C7.2 CON5.1 R6.2 U3.2 | length 150.5
  Top Layer w0.4: v1(20.193,72.136) U3.2
  Bottom Layer w0.4: v1(20.193,72.136) 22.753,72.136 22.987,71.902 22.987,50.653 23.221,50.419 40.66,50.419 40.894,50.653 40.894,53.868 41.128,54.102 92.964,54.102 C7.2 92.964,5.588 CON5.1
Touch_1: CON2.2 U3.5 | length 20.4
  Top Layer w0.4: v1(20.193,66.167) 24.353,66.167 U3.5
  Bottom Layer w0.4: CON2.2 8.836,54.864 20.139,66.167 v1(20.193,66.167)
Touch_2: CON3.2 U3.6 | length 23
  Top Layer w0.4: v1(20.194,64.136) U3.6
  Bottom Layer w0.4: CON3.2 8.882,50.292 14.637,56.047 15.24,56.65 15.24,59.182 v1(20.194,64.136)
Touch_3: CON4.2 U3.7 | length 25.5
  Top Layer w0.4: v1(20.226,62.136) U3.7
  Bottom Layer w0.4: CON4.2 8.882,45.72 16.637,53.475 16.637,58.547 v1(20.226,62.136)
pads on no net: U2.NC U3.3 U3.13 U3.21 U3.22

## Polygon pours and split planes (outlines as drawn)
+5V on Top Layer "Top Layer +5V" (solid, remove dead copper, pour order 4): 0,86.995 102.87,86.995 102.87,0 0,0
no net on Top Layer "Top Layer-No Net" (solid, remove dead copper, pour order 2): 0,86.36
220V(L) on Top Layer "Top Layer-220V(L)" (solid, remove dead copper, pour order 1): 0,0 0,21.59 86.36,21.59 90.17,17.78 90.17,0
GND_DC on Bottom Layer "Bottom Layer-GND-DC" (solid, remove dead copper, pour order 3): 0,86.995 102.87,86.995 102.87,0 0,0
220V(N) on Bottom Layer "Bottom Layer-220V(N)" (solid, remove dead copper, pour order 0): 0,0 0,21.59 86.36,21.59 90.17,17.78 90.17,0

## Other copper
Top Layer:
  pour cut-out: 12.573,77.978
  pour cut-out: 10.668,79.375 10.668,76.581 12.827,76.581 12.827,79.375
  pour cut-out: 12.319,76.962
  pour cut-out: 8.89,74.422 11.43,74.422 11.43,70.739 8.89,70.739
  pour cut-out: 8.89,74.422
  pour cut-out: 29.21,37.592 32.258,37.592 32.258,34.544 29.21,34.544
  pour cut-out: 32.156,36.119
  pour cut-out: 32.385,34.925

## Silkscreen, mask and mechanical layers (free items; w line width, h text height)
Board_Shape:
  lines w1: 0,0 0,86.868 102.743,86.868 102.743,0 4.953,0 0,0

## Text inside footprints (layer, text, board x,y; h text height)
P1: Top Overlay "1" at 37.712,51.132 h1.02 r180; Top Overlay "5" at 27.812,51.132 h1.02 r180